# Altium PCB PCB_Led_Traffic.PcbDoc
Units mil, origin at the board's own origin, x right, y up, seen from the top; angles counter-clockwise.
Board outline 4160.03 x 7646.96 mil, 2 copper layers (Top Layer, Bottom Layer); 8 components, 0 nets, 110 pads, 43 vias.
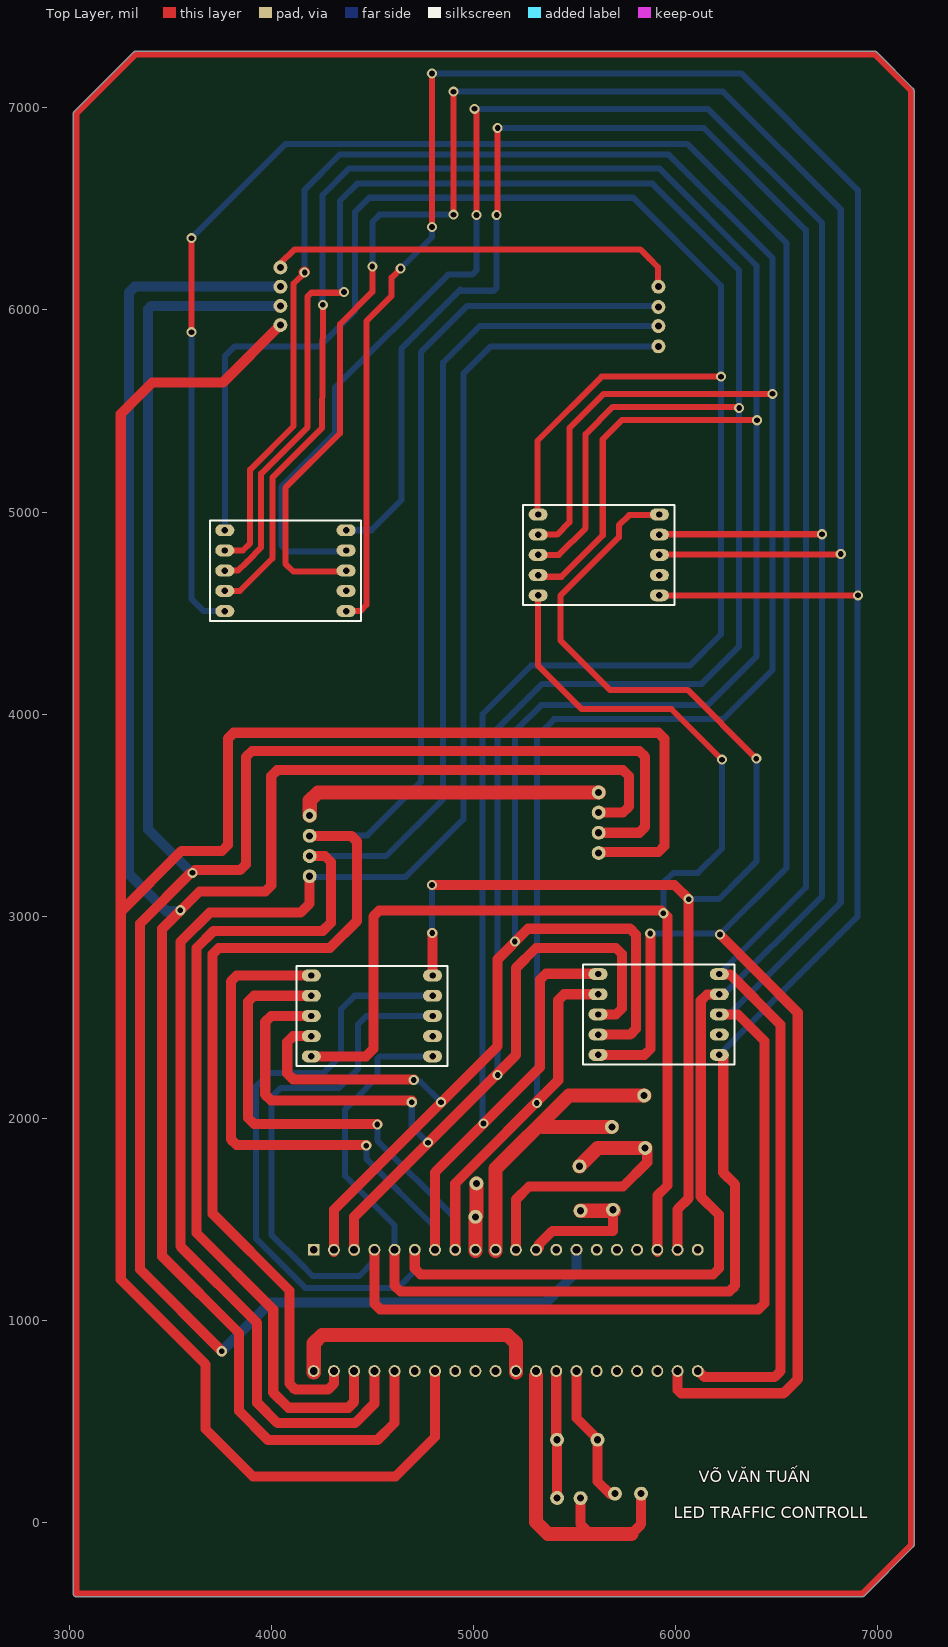
[diagram p0: Top Layer view]
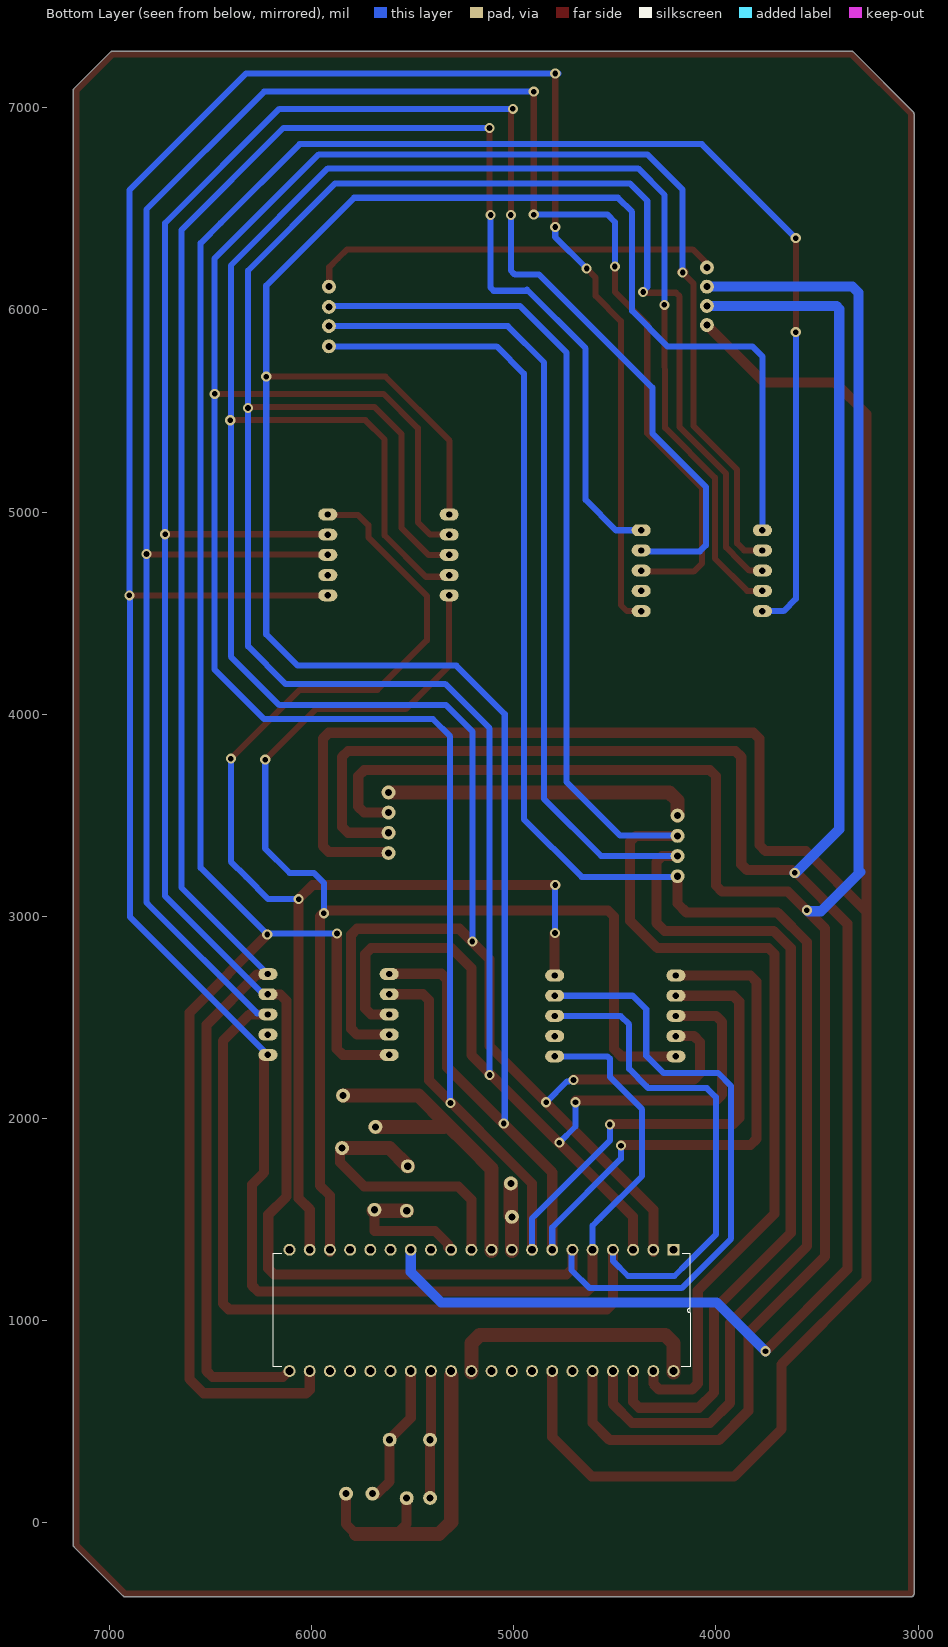
[diagram p1: Bottom Layer view, seen from below]

## Layer stack, top to bottom
Top Solder: solder mask 0.4, Solder Resist, Dk 3.5
Top Layer: signal copper 1.4
Dielectric 1: dielectric 12.6, FR-4, Dk 4.8
Bottom Layer: signal copper 1.4
Bottom Solder: solder mask 0.4, Solder Resist, Dk 3.5

## Board outline
3019.99,-351.93 3019.99,6970 cw(c3035,6970) 3024.4,6980.63 3024.38,6980.62 3319.38,7275.62 3319.37,7275.6 cw(c3330,7265) 3330,7280.02 6985,7280.02 cw(c6985,7265) 6995.63,7275.6 6995.62,7275.62 7175.62,7095.62 7175.6,7095.63 cw(c7165,7085) 7180.02,7085 7180.02,-110 cw(c7165,-110) 7175.6,-120.63 7175.62,-120.62 6933.69,-362.55 6933.7,-362.53 cw(c6923.07,-351.93) 6923.07,-366.95 3035,-366.95 cw(c3035,-351.93)

## Design rules (kind name [scope] priority, off if disabled: settings)
Clearance [All] p1: gap=10 ignorepadtopadclearanceinfootprint=FALSE except(0: Arc-Hole Track-Hole SMDPad-Hole THPad-Hole Via-Hole Fill-Hole Poly-Hole Region-Hole Text-Hole)
PolygonConnect [All] p1: connectstyle=Relief reliefconductorwidth=10 reliefentries=4 polygonreliefangle="90 Angle" airgapwidth=10
RoutingVias [All] p1: holewidth=28 width=50 viastyle="Through Hole" minholewidth=28 minwidth=50 maxholewidth=28 maxwidth=50
SolderMaskExpansion [All] p1: expansion=4 istentingtop=FALSE
Width [All] p1: maxlimit=10 minlimit=10 preferedwidth=10
30 further rules are at their usual default settings.

## Components (designator, comment, footprint, x,y, rotation, side; value= is the part's Value field where it differs from the comment)
? "Comment" LED7-0.56INCH 5587.08,3159.15 r90 top
? "Comment" LED7-0.56INCH 4036.89,3081.19 r90 top
? "Comment" LED7-0.56INCH 5949.9,4143.07 r270 top
? "Comment" OLED 4189.9,3198.07 r180 top
? "Comment" LED7-0.56INCH 4464.9,878.07 r90 top
? "Comment" pic16f877a 14975,-5 r270 bottom
? "Comment" thachanh 5414.29,410.01 r90 top
? "Comment" OLED 5619.9,3313.07 r180 top

## Footprints (in the part's own frame and the unit in brackets; to place one, negate y for a bottom-side part, rotate by r counter-clockwise, add the part's x,y. Pads: shape width x height; smd on the part's side, far side on the other; paste and mask are expansions set on the pad)
LED7-0.56INCH [mm]
  oval 1.5x2.4 hole 0.8 paste+0 mask+0.051: 1(36.292,-8.461) 2(38.832,-8.461) 3(41.372,-8.461) 4(43.912,-8.461) 5(46.452,-8.461) 6(46.452,6.779) 7(43.912,6.779) 8(41.372,6.779) 9(38.832,6.779) 10(36.292,6.779)
  silkscreen extent 35.07,-10.34 47.67,8.66
OLED [mil]
  round 69.02 hole 35: 5(0,0) 6(0,-100) 7(0,-200) 8(0,-300)
pic16f877a [mil]
  rect 59x59 / inner round 59 / far side rect 59x59 hole 39: 1(-1355,10765)
  round 59 hole 39: 2(-1355,10665) 3(-1355,10565) 4(-1355,10465) 5(-1355,10365) 6(-1355,10265) 7(-1355,10165) 8(-1355,10065) 9(-1355,9965) 10(-1355,9865) 11(-1355,9765) 12(-1355,9665) 13(-1355,9565) 14(-1355,9465) 15(-1355,9365) 16(-1355,9265) 17(-1355,9165) 18(-1355,9065) 19(-1355,8965) 20(-1355,8865) 21(-755,8865) 22(-755,8965) 23(-755,9065) 24(-755,9165) 25(-755,9265) 26(-755,9365) 27(-755,9465) 28(-755,9565) 29(-755,9665) 30(-755,9765) 31(-755,9865) 32(-755,9965) 33(-755,10065) 34(-755,10165) 35(-755,10265) 36(-755,10365) 37(-755,10465) 38(-755,10565) 39(-755,10665) 40(-755,10765)
  silkscreen extent -1335,8783 -775,10847, body extent -1356,8791 -744,10849, height 190
thachanh [mil]
  round 69.02 hole 35: 11(0,0) 12(0,-200)

## Free pads (board coordinates)
  round 69.02 hole 35: 7(4045,5925) 7(4045,6020) 7(4045,6115) 7(4045,6210) 7(5915,5820) 7(5915,5920) 7(5915,6015) 7(5915,6115) 13(5844.9,2113.07) 14(5684.79,1958.06) 15(5850.01,1853.08) 16(5009.9,1513.07) 16(5014.9,1678.07) 16(5524.9,1763.07) 16(5529.9,1543.07) 16(5689.9,1548.07) 17(5414.29,122.18) 18(5530.09,120.81) 19(5699.9,143.07) 20(5829.9,143.07)

## Via types
v1: diameter 50, hole 28, Top Layer to Bottom Layer, 43 vias

## Nets (pads, with @x,y where several pads share a name; then routed paths per layer and width w, separated by ;. In a path a pad name is that pad's centre, name@x,y a point inside that pad or via, vN(x,y) a via of type N, cw(c..) or ccw(c..) an arc to the next point about the centre after c; other vN are vias at no path point)
pads on no net: ?.1 ?.2 ?.3 ?.4 ?.5 ?.6 ?.7 ?.8 ?.9 ?.10 ?.11 ?.12 ?.13 ?.14 ?.15 ?.16 ?.17 ?.18 ?.19 ?.20 ?.21 ?.22 ?.23 ?.24 ?.25 ?.26 ?.27 ?.28 ?.29 ?.30 ?.31 ?.32 ?.33 ?.34 ?.35 ?.36 ?.37 ?.38 ?.39 ?.40
copper on no net: | length 239349.6
  Top Layer w10: v1(3605,5890) v1@3615,5880 ; 4045,6210 4045,6230 ; 4180,6065 4180,6066.88 ; 4365,4705 4370,4710 ; v1@4900,6470 v1(4901.37,6471.37) ; v1(5115,6470) v1@5120.05,6475.05 ; 5317.24,4985 5320.2,4987.96 ; 5320.2,4687.96 5328.15,4680 ; 5917.23,4985 5920.19,4987.96 ; 5920.19,4587.96 5922.23,4590 ; 5920.19,4787.96 5924.73,4792.5 ; 5920.19,4887.96 5922.23,4890 ; v1@6900,4590 v1(6902.5,4587.5)
  Top Layer w30: v1(3605,5890) v1(3605,6355) ; 3755.33,4610 3845,4610 4005,4770 4005,5170 4251.79,5416.79 v1@4255,6005 ; 3758.38,4810 3860,4810 3895,4845 3895,5210 4110,5425 4110,6130 v1(4165,6185) ; 3770.01,4710 3835,4710 3880,4755 3950,4825 3950,5190 4180,5420 4180,6065 ; 4045,6230 4115,6300 5825,6300 5870,6255 5913.18,6211.82 5913.18,6115 ; 4180,6066.88 4198.12,6085 v1@4360,6085 ; 4360.01,4510 4440,4510 4470,4540 4470,4570 4470,5945 4595,6070 4595,6160 v1(4640,6205) ; 4365,4705 4110,4705 4070,4745 4070,5120 4340,5390 4340,5930 4500,6090 v1(4500,6215) ; v1(4795,6410) v1@4795,7175 ; v1(4901.37,6471.37) v1(4901.37,7080) ; v1(5015,6470) v1@5015,6995 ; v1@5120.05,6475.05 v1(5120.05,6900) ; 5317.24,4985 5317.24,5352.24 5635,5670 v1(6225,5670) ; 5320.2,4587.96 5320.2,4239.8 5535,4025 5980,4025 v1(6230,3775) ; 5320.2,4787.96 5422.96,4787.96 5555,4920 5555,5385 5690,5520 v1@6315,5520 ; 5320.2,4887.96 5414.13,4887.96 5475,4948.83 5475,5415 5645,5585 v1(6480,5585) ; 5328.15,4680 5435,4680 5640,4885 5640,5360 5734.34,5454.34 v1(6403.33,5454.34) ; 5917.23,4985 5857.94,4985 5770,4985 5720,4935 5720,4875 5430,4585 5430,4365 5675,4120 6060,4120 v1(6400,3780) ; 5920.19,4587.5 v1(6902.5,4587.5) ; 5922.23,4890 6035,4890 v1(6725,4890) ; 5969.73,4790 v1@6817.5,4790 ; 3035,-351.93 6923.07,-351.93 7165,-110 7165,7085 6985,7265 3330,7265 3035,6970 3035,-351.93
  Top Layer w50: v1(3754.9,848.07) 3349.9,1253.07 3349.9,2963.07 3601.83,3215 v1(3610,3215) 3623.07,3228.07 3735,3228.07 3845.61,3228.07 3874.9,3257.36 3874.9,3788.78 3904.19,3818.07 5820.61,3818.07 5849.9,3788.78 5849.9,3442.36 5820.61,3413.07 5611.12,3413.07 ; 4045,5925 3760,5640 3410,5640 3254.9,5484.9 3254.9,3023.07 ; v1@4160.38,6186.91 4162.29,6186.91 4165,6189.62 v1@4167.71,6186.91 ; 4189.9,3198.07 4189.9,3063.07 4144.9,3018.07 3694.9,3018.07 3549.9,2873.07 3549.9,1368.07 3929.9,988.07 3929.9,593.07 4029.9,493.07 4414.9,493.07 4509.9,588.07 4509.9,747.23 ; 4189.9,3298.07 4265.61,3298.07 4294.9,3268.78 4294.9,2968.07 4254.9,2928.07 3714.9,2928.07 3629.9,2843.07 3629.9,1433.07 4009.9,1053.07 4009.9,643.07 4084.9,568.07 4380.61,568.07 4409.9,597.36 4409.9,743.07 ; 4189.9,3398.07 4395.61,3398.07 4424.9,3368.78 4424.9,2978.07 4289.9,2843.07 3739.9,2843.07 3709.9,2813.07 3709.9,1528.07 4089.9,1148.07 4089.9,687.36 4119.19,658.07 4280.61,658.07 4309.9,687.36 4309.9,743.07 ; 4198.01,2306.88 4468.71,2306.88 4504.9,2343.07 4504.9,2998.78 4534.19,3028.07 4821.39,3028.07 ; 4198.01,2506.88 3999.19,2506.88 3969.9,2477.59 3969.9,2117.36 3999.19,2088.07 4624.9,2088.07 v1@4694.9,2088.07 ; 4198.01,2606.88 3914.19,2606.88 3884.9,2577.59 3884.9,2002.36 3914.19,1973.07 4454.9,1973.07 v1@4524.9,1973.07 ; 4198.01,2706.88 3829.19,2706.88 3799.9,2677.59 3799.9,2458.07 3799.9,1897.36 3829.19,1868.07 4389.9,1868.07 v1@4469.9,1868.07 ; 4199.2,2408.07 4198.01,2406.88 4108,2406.88 4078.71,2377.59 4078.71,2222.36 4108,2193.07 v1@4704.9,2193.07 ; 4309.9,1338.91 4309.9,1548.07 5119.9,2358.07 5119.9,2788.07 5269.9,2938.07 5775.61,2938.07 5804.9,2908.78 5804.9,2443.55 5775.61,2414.26 5616.79,2414.26 ; 4409.9,1343.07 4409.9,1513.07 5209.9,2313.07 5209.9,2743.07 5309.9,2843.07 5705.61,2843.07 5734.9,2813.78 5734.9,2597.05 5734.9,2543.55 5705.61,2514.26 5616.79,2514.26 ; 4509.9,1343.07 4509.9,1084.29 4539.19,1055 6410.61,1055 6439.9,1084.29 6439.9,2383.07 6308.71,2514.26 6216.79,2514.26 ; 4609.9,743.07 4609.9,493.07 4524.9,408.07 3984.9,408.07 3839.9,553.07 3839.9,938.07 3459.9,1318.07 3459.9,2938.07 3644.9,3123.07 3970.61,3123.07 3999.9,3152.36 3999.9,3693.78 4029.19,3723.07 5740.61,3723.07 5769.9,3693.78 5769.9,3542.36 5740.61,3513.07 5619.9,3513.07 ; 4609.9,1347.23 4609.9,1172.36 4639.19,1143.07 6265.61,1143.07 6294.9,1172.36 6294.9,1673.07 6236.24,1731.73 6236.24,2310.08 6232.05,2314.26 6216.79,2314.26 ; 4709.9,1343.07 4709.9,1257.36 4739.19,1228.07 6185.61,1228.07 6214.9,1257.36 6214.9,1523.07 6125,1612.97 6125,2581.93 6155.6,2612.53 6215.05,2612.53 6216.79,2614.26 ; v1(4795,3155) 5923.22,3155 5995,3155 v1(6065,3085) 6065,1605 6009.9,1549.9 6009.9,1343.07 ; v1(4796.16,2917.03) 4798.01,2915.18 4798.01,2706.88 ; 4809.9,743.07 4809.9,423.07 4614.9,228.07 3909.9,228.07 3674.9,463.07 3674.9,783.07 3254.9,1203.07 3254.9,3023.07 ; 4809.9,1343.07 4809.9,1733.07 5329.9,2253.07 5329.9,2686.52 5359.19,2715.81 5615.24,2715.81 5616.79,2714.26 ; 4819.9,3028.07 5930.61,3028.07 5959.9,2998.78 5959.9,1668.07 5909.9,1618.07 5909.9,1339.2 ; 4909.9,1343.07 4909.9,1678.07 5419.9,2188.07 5419.9,2584.97 5449.19,2614.26 5636.83,2614.26 ; 5209.9,1343.07 5209.9,1598.07 5274.9,1663.07 5739.9,1663.07 5859.9,1783.07 5859.9,1838.04 5850.01,1847.94 5850.01,1853.08 ; 5309.9,1343.07 5309.9,1345.5 5325.4,1361 5325.4,1378.07 5390.4,1443.07 5689.9,1443.07 ; 5409.9,410.01 5409.9,728.07 ; 5414.29,122.18 5414.29,410.01 ; 5509.9,743.07 5509.9,568.07 5509.9,518.07 5614.29,413.68 5614.29,410.01 5614.29,203.69 5676.9,141.07 5699.9,143.07 ; 5530.09,120.81 5530.09,-7.64 5559.38,-36.93 ; 5616.79,2314.26 5846.8,2314.26 5876.09,2343.55 v1@5876.09,2913.07 ; 5619.04,3316.71 5636.98,3316.71 5638.35,3318.07 5915.61,3318.07 5944.9,3347.36 5944.9,3878.78 5915.61,3908.07 3814.19,3908.07 3784.9,3878.78 3784.9,3352.36 3755.61,3323.07 3554.9,3323.07 3254.9,3023.07 ; 5689.9,1444.64 5689.9,1548.07 ; 5780.61,-56.93 5829.9,-7.64 5829.9,143.07 ; 5911.36,6118.64 5915,6115 ; 6009.9,728.07 6009.9,657.57 6027.47,640 6535,640 6604.9,709.9 6604.9,2523.07 v1(6220,2910) ; 6110,750 6112.44,750 6142.44,720 6490.61,720 6519.9,749.29 6519.9,2463.07 6270.44,2712.53 6218.52,2712.53 6216.79,2714.26
  Top Layer w70: 4189.9,3498.07 4189.9,3572.06 4230.9,3613.07 5619.9,3613.07 ; 4209.9,743.07 4209.9,887.06 4250.9,928.07 4376.61,928.07 5168.89,928.07 5209.9,887.06 5209.9,743.07 ; 5009.9,1343.07 5009.9,1513.07 5014.9,1518.07 5014.9,1678.07 ; 5109.9,1343.07 5109.9,1728.07 5109.9,1750.79 5222.18,1863.07 5332.1,1972.99 5472.18,2113.07 5588.65,2113.07 5649.9,2113.07 5844.9,2113.07 ; 5309.9,728.07 5309.9,323.07 5309.9,3.07 5369.9,-56.93 5559.38,-56.93 5780.61,-56.93 ; 5347.03,1958.07 5684.78,1958.07 ; 5524.9,1763.07 5614.91,1853.08 5674.78,1853.08 5850.01,1853.08 ; 5529.9,1543.07 5694.9,1543.07
  Bottom Layer w10: 4140,1285 4150,1285 ; 4365,4805 4374.07,4814.07 ; v1(4705,2190) v1@4712.65,2182.35 ; 4710,1350 4715,1345 ; v1(4796.16,2917.03) v1@4801.16,2922.03 ; v1@5000,7010 v1@5015,6995 ; v1(5875,2915) v1@5875.62,2914.38 ; v1@6215.62,2914.38 v1(6220,2910) ; 6216.79,2614.26 6239.26,2614.26
  Bottom Layer w30: v1(3605,5890) 3605,4570 3665,4510 3770.01,4510 ; v1(3605,6355) 4070,6820 6060,6820 6450,6430 6550,6330 6550,5462.43 6550,3240 v1(6220,2910) ; 3770.01,4910 3770.01,5395.01 3770.01,5770.01 3820,5820 4240,5820 4415,5995 4415,6485 4485,6555 5790,6555 6225,6120 v1(6225,5670) 6225,4395 6070,4240 5285,4240 5045,4000 v1@5045,1970 ; v1(4165,6185) 4165,6595 4340,6770 5965,6770 6480,6255 6480,4220 6235,3975 5400,3975 5315,3890 5315,2085 v1(5313.75,2076.25) ; 4189.9,3298.07 4568.07,3298.07 4850,3580 4850,5740 5030,5920 5915,5920 ; 4191.83,3400 4475,3400 4740,3665 4740,5790 4970,6020 5915,6020 ; 4195,3195 4665,3195 4950,3480 4950,5685 5085,5820 5915,5820 ; v1@4253.58,6038.58 4253.58,6091.42 4253.58,6568.58 4385,6700 5920,6700 6400,6220 6400,4285 6160,4045 5335,4045 5205,3915 v1(5205,2875) ; 4359.76,4910 4495,4910 4645,5060 4645,5490 4645,5810 4935,6100 4940,6095 5100,6095 5115,6110 v1(5115,6470) ; v1@4360,6085 4360,6093.12 4340,6113.12 4340,6540 4425,6625 4560,6625 ; 4365,4805 4080,4805 4050,4835 4050,5125 4315,5390 4315,5615 4875,6175 4995,6175 5000,6180 5015,6195 v1(5015,6470) ; v1(4470,1865) 4470,1800 4810,1460 4810,1335.69 ; v1(4500,6215) 4500,6435 4536.37,6471.37 v1(4901.37,6471.37) ; 4510,1350 4510,1295 4435,1220 4205,1220 4140,1285 4000,1425 4000,2060 4000,2105 4045,2150 4335,2150 4345,2160 4430,2245 4430,2435 4430,2465 4470,2505 4471.88,2506.88 4798.01,2506.88 ; v1(4525,1970) 4525,1890 4890,1525 4910,1505 4910,1336.27 ; 4557.39,6625 5885,6625 6315,6195 6315,4335 6130,4150 5340,4150 5120,3930 v1(5120,2215) ; 4610,1350 4610,1405 4610,1470 4575,1505 4365,1715 4365,2045 4420,2100 4525,2205 4525,2295 4536.88,2306.88 4798.01,2306.88 ; v1(4640,6205) 4795,6360 v1(4795,6410) ; v1(4695,2080) 4695,1960 v1(4775,1880) ; v1@4711.53,2183.47 4714.24,2186.17 4722.97,2186.17 4726.8,2182.35 4737.65,2182.35 v1(4840,2080) ; 4715,1345 4715,1250 4625,1160 4170,1160 3925,1405 3925,2145 3925,2160 3990,2225 4260,2225 4265,2230 4345,2310 4345,2540 4411.88,2606.88 4798.01,2606.88 ; v1@4780,7170 6325,7170 6835,6660 6902.5,6592.5 v1(6902.5,4587.5) 6900,4585 6900,2997.47 6216.79,2314.26 ; v1(4795,3155) 4795.58,3154.42 4795.58,2926.27 4799.82,2922.03 v1@4801.16,2922.03 ; v1(4901.37,7080) 6235,7080 6817.5,6497.5 v1(6817.5,4792.5) 6817.5,3067.5 6810,3060 6269.82,2519.82 6222.35,2519.82 6216.79,2514.26 ; v1@5015,6995 6160,6995 6725,6430 6725,3100 6239.26,2614.26 ; v1(5120.05,6900) 6140,6900 6645,6395 6645,3280 6645,3142.47 6216.79,2714.26 ; v1@5875.62,2914.38 v1@6215.62,2914.38 ; v1(5940,3015) 5940,3165 5990,3215 6110,3215 6230,3335 v1(6230,3775) ; v1(6065,3085) 6215,3085 6325,3195 6400,3270 v1(6400,3780)
  Bottom Layer w50: 3285,3220 3480,3025 3545,3025 v1(3550,3030) ; 3295,3225 3295,6085.71 3324.29,6115 4045,6115 ; v1(3610,3215) 3605,3215 3390,3430 3390,6005 3405,6020 4045,6020 ; v1(3754.9,848.07) 3996.83,1090 5360,1090 5510,1240 5510,1350 ; 4189.9,3398.07 4191.83,3400
  other v1: 5050,1975 6315,5515 4255,6025 4360,6089.06 5005,6995 4795,7170

## Silkscreen, mask and mechanical layers (free items; w line width, h text height)
Top Overlay:
  text "VÕ VĂN TUẤN" at 6115,180 h100
  text "LED TRAFFIC CONTROLL" at 5990,1.11 h100